# EAGLE board project_pcb (EAGLE 8.7.1)
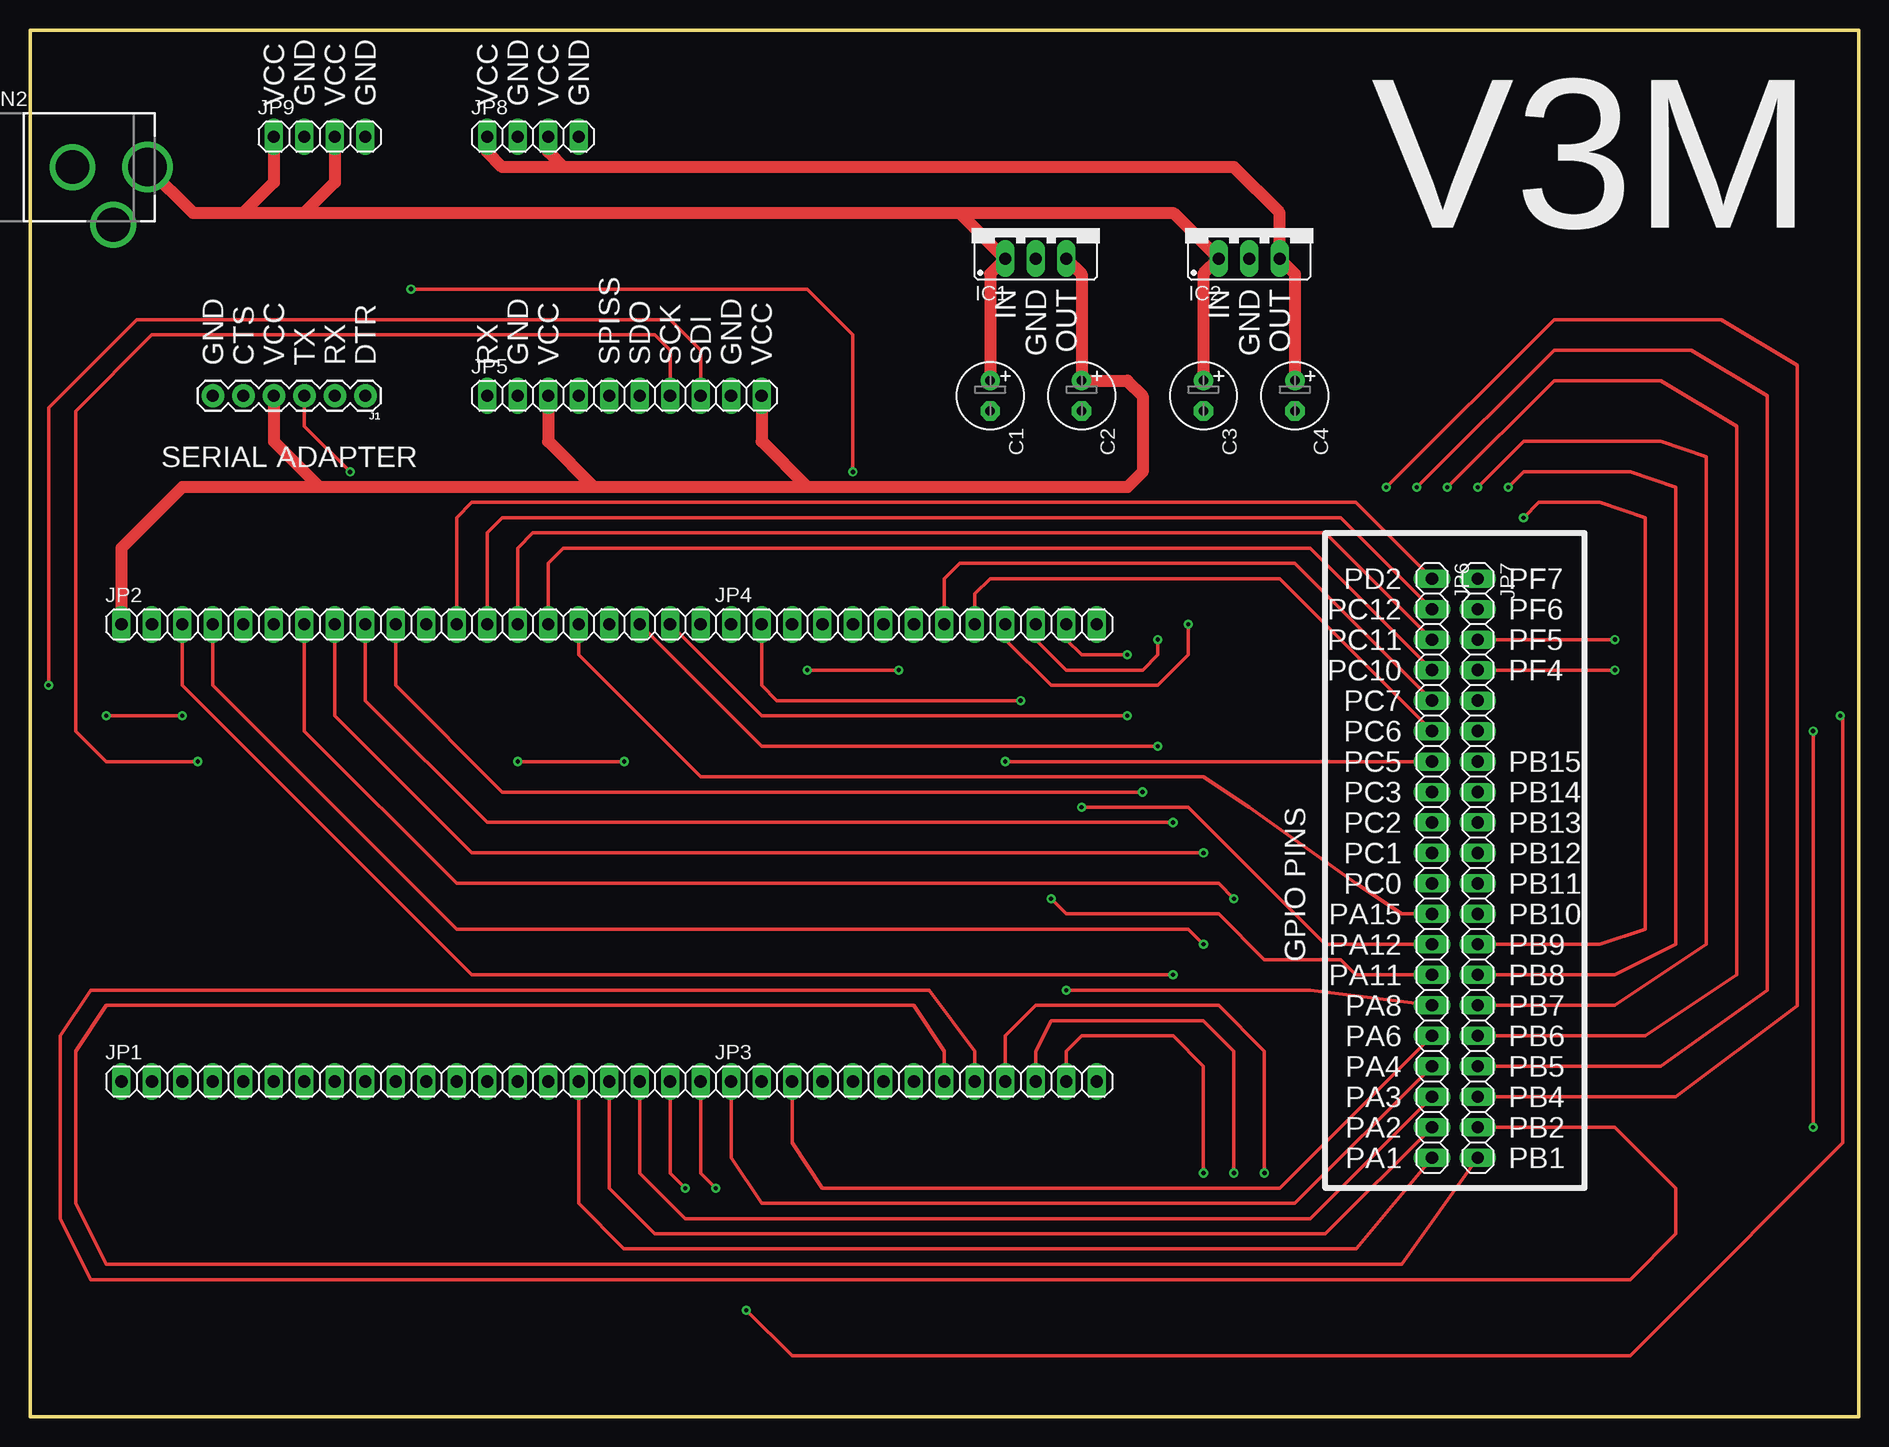
[diagram p0: board, top side]
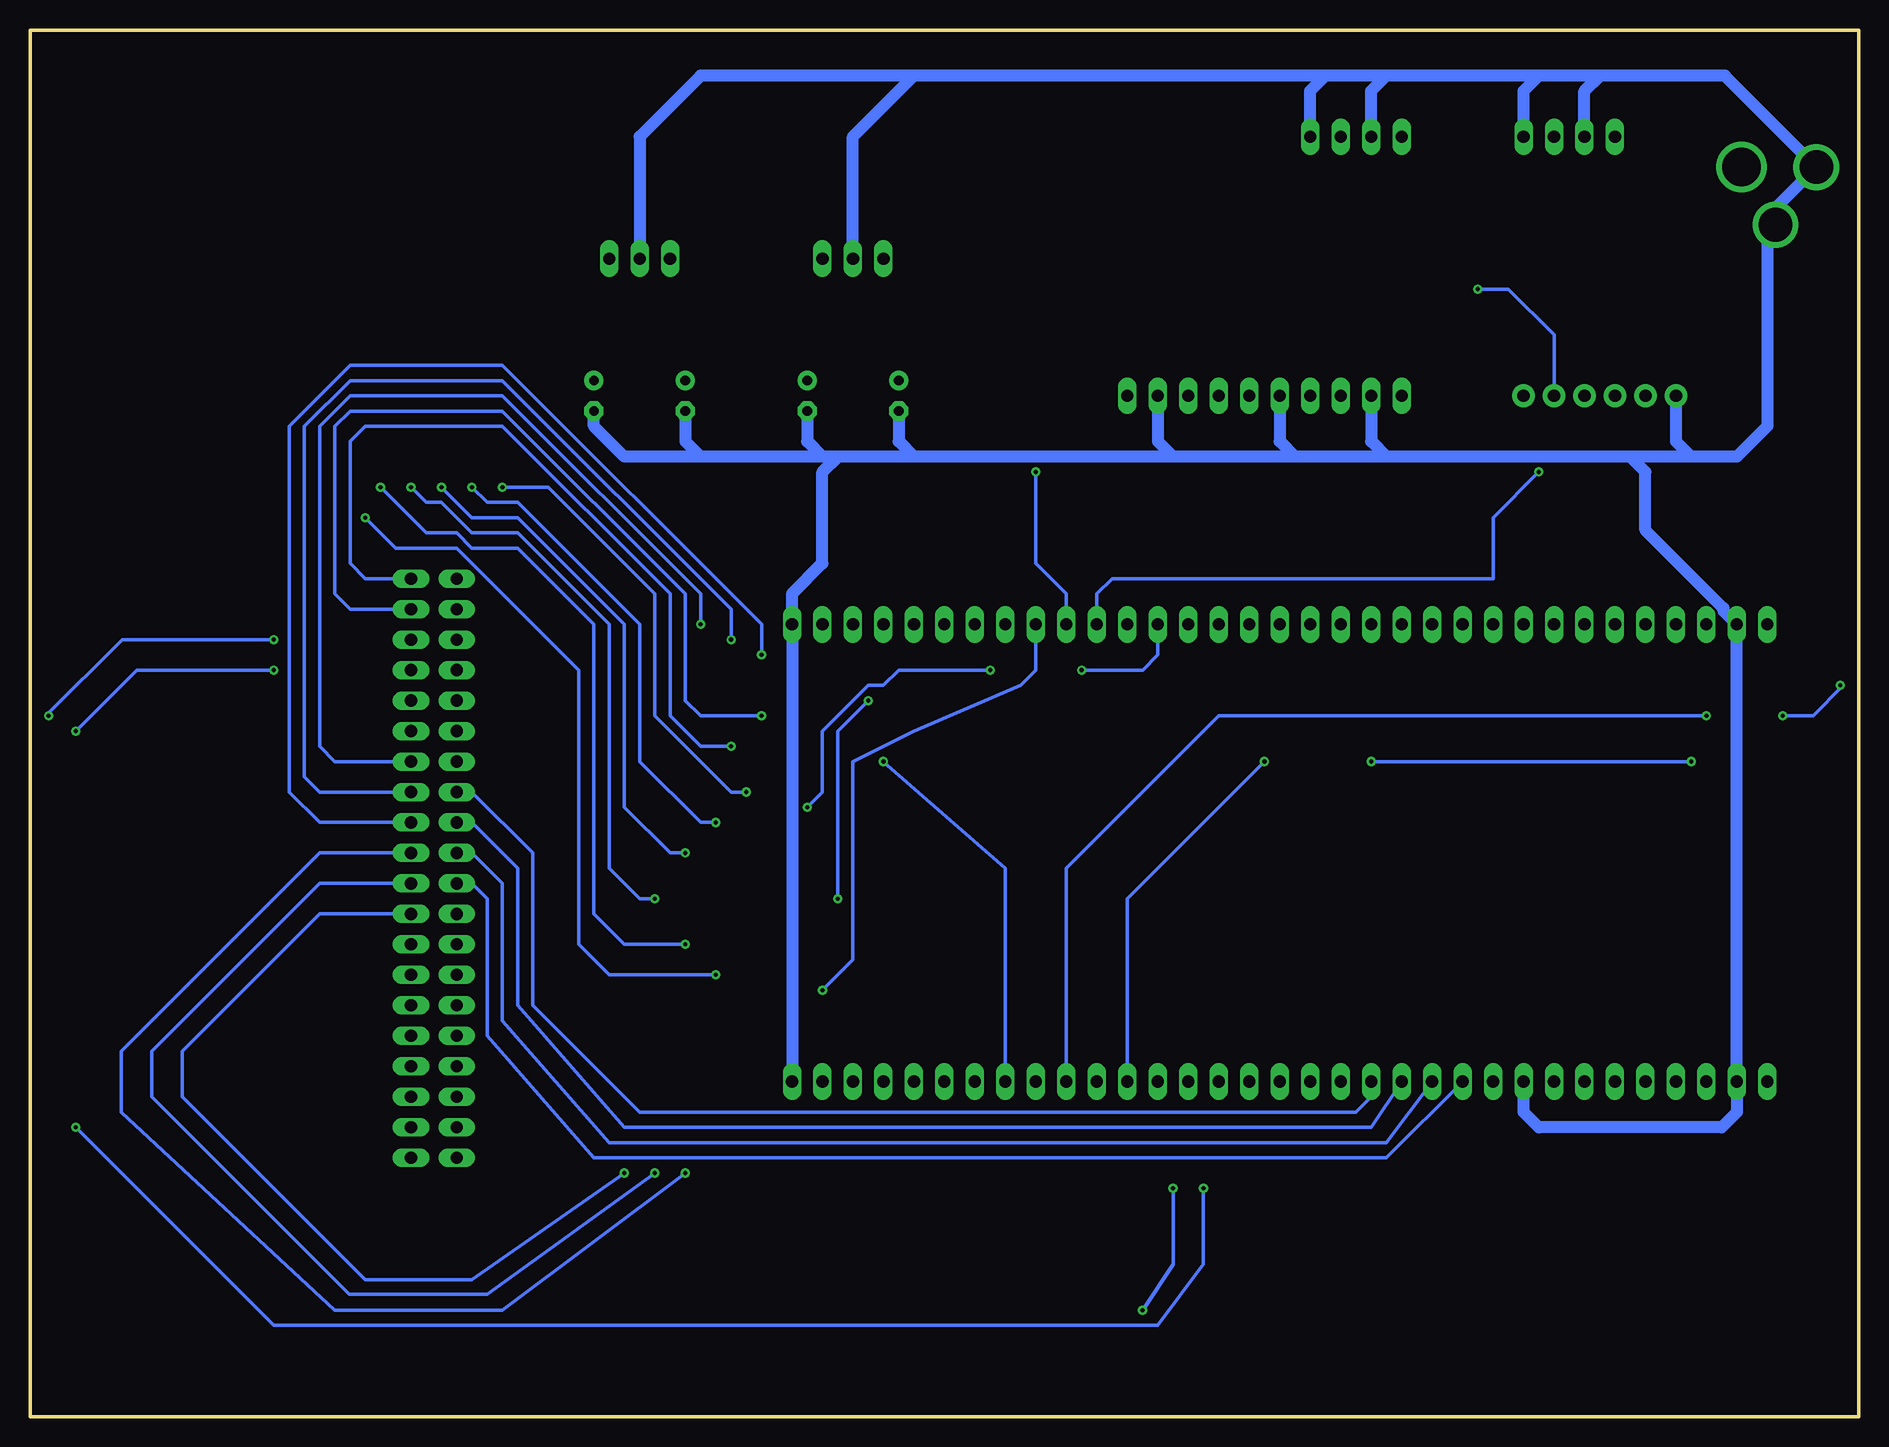
[diagram p1: board, bottom side, seen from below]

Size 152.4 x 115.57 mm. Coordinates in mm from the lower left corner, seen from the top.
Outline: 0,0 0,115.57 152.4,115.57 152.4,0 0,0
Copper layers (1*16): Top 0.035mm / dielectric 1.5mm / Bottom 0.035mm
Design rules "default": minimum track width 6mil, minimum drill 0.35mm, track to track 6mil, track to pad 6mil, pad to pad 6mil, via to via 6mil, smd to smd 6mil, copper to edge 40mil, drill to drill 6mil, minimum pad ring 10mil, minimum via ring 8mil, stop-mask expansion 4mil, vias tented up to drill 0mil, thermal gap 10mil
Net classes: 0 default: width 0.305 mm

## Footprints (pad centres in the part's own frame; a part is rotated, then mirrored left to right if it is on the bottom)
E2,5-6 = drill 0.813 pad 1.6: + -1.27,0 | drill 0.813 pad 1.6 octagon: - 1.27,0
DCJACK_2MM_PTH = drill 2.8: GND 0,7.35; GNDBREAK 4.8,10.75 | drill 3.2: PWR 0,13.6
78XXS = drill 1.016 long: GND 0,-2.54; IN -2.54,-2.54; OUT 2.54,-2.54
1X06 = drill 1.016 pad 1.88: 1 0,0; 2 2.54,0; 3 5.08,0; 4 7.62,0; 5 10.16,0; 6 12.7,0
1X20 = drill 1.016 long: 1 -24.13,0; 2 -21.59,0; 3 -19.05,0; 4 -16.51,0; 5 -13.97,0; 6 -11.43,0; 7 -8.89,0; 8 -6.35,0; 9 -3.81,0; 10 -1.27,0; 11 1.27,0; 12 3.81,0; 13 6.35,0; 14 8.89,0; 15 11.43,0; 16 13.97,0; 17 16.51,0; 18 19.05,0; 19 21.59,0; 20 24.13,0
1X13 = drill 1.016 long: 1 -15.24,0; 2 -12.7,0; 3 -10.16,0; 4 -7.62,0; 5 -5.08,0; 6 -2.54,0; 7 0,0; 8 2.54,0; 9 5.08,0; 10 7.62,0; 11 10.16,0; 12 12.7,0; 13 15.24,0
1X10 = drill 1.016 long: 1 -11.43,0; 2 -8.89,0; 3 -6.35,0; 4 -3.81,0; 5 -1.27,0; 6 1.27,0; 7 3.81,0; 8 6.35,0; 9 8.89,0; 10 11.43,0
1X04 = drill 1.016 long: 1 -3.81,0; 2 -1.27,0; 3 1.27,0; 4 3.81,0

## Placement (x,y rotation side)
C1  [E2,5-6]  80.01,85.09 270 top
C2  [E2,5-6]  87.63,85.09 270 top
C3  [E2,5-6]  97.79,85.09 270 top
C4  [E2,5-6]  105.41,85.09 270 top
CN2  [DCJACK_2MM_PTH]  -3.81,104.14 270 top
IC1  [78XXS]  83.82,99.06 0 top
IC2  [78XXS]  101.6,99.06 0 top
J1  [1X06]  27.94,85.09 180 top
JP1  [1X20]  31.75,27.94 0 top
JP2  [1X20]  31.75,66.04 0 top
JP3  [1X13]  73.66,27.94 0 top
JP4  [1X13]  73.66,66.04 0 top
JP5  [1X10]  49.53,85.09 0 top
JP6  [1X20]  116.84,45.72 270 top
JP7  [1X20]  120.65,45.72 270 top
JP8  [1X04]  41.91,106.68 0 top
JP9  [1X04]  24.13,106.68 0 top

## Library data of the parts
C1-C4 = rcl; SPICEPREFIX: C
CN2 = adafruit
IC1 IC2 = v-reg
J1 = SparkFun-Connectors
JP1-JP9 = pinhead

## Nets
N$1: J1.3 JP4.3
N$2: J1.2 JP4.4
N$3: C2.+ IC1.OUT J1.4 JP2.1 JP5.3 JP5.10
N$4: C1.- C2.- C3.- C4.- CN2.GND CN2.GNDBREAK IC1.GND IC2.GND J1.6 JP1.2 JP1.9 JP2.2 JP3.13 JP4.13 JP5.2 JP5.5 JP5.9 JP8.2 JP8.4 JP9.2 JP9.4
N$5: JP3.2 JP5.7
N$6: JP3.4 JP5.8
N$7: JP1.16 JP6.20
N$8: JP1.17 JP6.19
N$9: JP1.18 JP6.18
N$10: JP3.1 JP6.17
N$11: JP3.3 JP6.16
N$12: JP4.5 JP6.15
N$13: JP4.2 JP6.14
N$14: JP4.1 JP6.13
N$15: JP2.16 JP6.12
N$16: JP1.11 JP6.11
N$17: JP1.12 JP6.10
N$18: JP1.13 JP6.9
N$19: JP1.14 JP6.8
N$20: JP3.6 JP6.7
N$21: JP4.9 JP6.6
N$22: JP4.8 JP6.5
N$23: JP2.15 JP6.4
N$24: JP2.14 JP6.3
N$25: JP2.13 JP6.2
N$26: JP2.10 JP7.18
N$27: JP3.8 JP7.20
N$28: JP3.9 JP7.19
N$29: JP2.9 JP7.17
N$30: JP2.8 JP7.16
N$31: JP2.7 JP7.15
N$32: JP2.4 JP7.14
N$33: JP2.3 JP7.13
N$34: JP3.10 JP7.12
N$35: JP3.11 JP7.11
N$36: JP3.12 JP7.10
N$37: JP4.12 JP7.9
N$38: JP4.11 JP7.8
N$39: JP4.10 JP7.7
N$40: JP2.18 JP7.1
N$41: JP2.19 JP7.2
N$42: JP1.20 JP7.3
N$43: JP1.19 JP7.4
N$44: JP2.12 JP6.1
N$45: C4.+ IC2.OUT JP8.1 JP8.3
N$47: C1.+ C3.+ CN2.PWR IC1.IN IC2.IN JP9.1 JP9.3

## Tracks (layer width: path | path; a pad name or v marks a point on that pad's centre or on a via)
N$1  (via drill 0.35)
  Top 0.305: v26.67,78.74 22.86,82.55 J1.3
  Bottom 0.305: JP4.3 63.5,68.58 62.23,69.85 30.48,69.85 30.48,74.93 v26.67,78.74
N$2  (via drill 0.35)
  Top 0.305: v68.58,78.74 68.58,90.17 64.77,93.98 v31.75,93.98
  Bottom 0.305: JP4.4 66.04,68.58 68.58,71.12 v68.58,78.74 | v31.75,93.98 29.21,93.98 25.4,90.17 J1.2
N$3
  Top 1.016: IC1.OUT 87.63,95.25 C2.+ 91.44,86.36 92.71,85.09 92.71,78.74 91.44,77.47 64.77,77.47 | JP2.1 7.62,72.39 12.7,77.47 24.13,77.47 | 64.77,77.47 46.99,77.47 | 46.99,77.47 24.13,77.47 | J1.4 20.32,81.28 24.13,77.47 | JP5.3 43.18,81.28 46.99,77.47 | JP5.10 60.96,81.28 64.77,77.47
N$4
  Bottom 1.016: 21.59,111.76 11.16,111.76 CN2.GND 6.94,100.74 CN2.GNDBREAK 7.62,98.66 7.62,82.55 10.16,80.01 13.97,80.01 | 21.59,111.76 26.67,111.76 | 26.67,111.76 39.37,111.76 | 39.37,111.76 44.45,111.76 | 44.45,111.76 78.74,111.76 | 78.74,111.76 96.52,111.76 101.6,106.68 IC2.GND | IC1.GND 83.82,106.68 78.74,111.76 | 44.45,111.76 45.72,110.49 JP8.4 | JP8.2 40.64,110.49 39.37,111.76 | JP9.4 27.94,110.49 26.67,111.76 | JP9.2 22.86,110.49 21.59,111.76 | 13.97,80.01 19.05,80.01 | 19.05,80.01 39.37,80.01 | 39.37,80.01 46.99,80.01 | 46.99,80.01 57.15,80.01 | 57.15,80.01 78.74,80.01 | 78.74,80.01 85.09,80.01 | 85.09,80.01 86.36,80.01 | 86.36,80.01 96.52,80.01 | 96.52,80.01 102.87,80.01 105.41,82.55 C4.- | C3.- 97.79,81.28 96.52,80.01 | C2.- 87.63,81.28 86.36,80.01 | C1.- 80.01,81.28 78.74,80.01 | JP5.9 58.42,81.28 57.15,80.01 | JP5.5 48.26,81.28 46.99,80.01 | JP5.2 40.64,81.28 39.37,80.01 | J1.6 15.24,81.28 13.97,80.01 | 19.05,80.01 17.78,78.74 17.78,73.89 11.28,67.39 11.28,67.16 JP2.2 JP1.2 10.16,25.4 11.43,24.13 26.67,24.13 27.94,25.4 JP1.9 | 85.09,80.01 86.36,78.74 86.36,71.12 88.9,68.58 JP4.13 JP3.13
N$5  (via drill 0.35)
  Top 0.305: v49.53,54.61 v40.64,54.61 | v13.97,54.61 6.35,54.61 3.81,57.15 3.81,83.82 10.16,90.17 52.07,90.17 53.34,88.9 JP5.7
  Bottom 0.305: JP3.2 60.96,43.18 v49.53,54.61 | v40.64,54.61 v13.97,54.61
N$6  (via drill 0.35)
  Top 0.305: v12.7,58.42 v6.35,58.42 | v1.55,60.96 1.55,84.1 8.89,91.44 53.34,91.44 55.88,88.9 JP5.8
  Bottom 0.305: JP3.4 66.04,45.72 53.34,58.42 v12.7,58.42 | v6.35,58.42 3.81,58.42 1.32,60.91 1.32,60.96 v1.55,60.96
N$7
  Top 0.305: JP1.16 45.72,17.78 49.48,14.02 110.54,14.02 JP6.20
N$8
  Top 0.305: JP6.19 107.95,15.24 52.07,15.24 48.26,19.05 JP1.17
N$9
  Top 0.305: JP1.18 50.8,20.32 54.61,16.51 106.68,16.51 JP6.18
N$10
  Top 0.305: JP3.1 58.42,21.59 60.96,17.78 105.41,17.78 JP6.17
N$11
  Top 0.305: JP3.3 63.5,22.86 66.04,19.05 104.14,19.05 JP6.16
N$12  (via drill 0.35)
  Top 0.305: JP6.15 106.68,35.56 v86.36,35.56
  Bottom 0.305: v86.36,35.56 83.82,38.1 83.82,54.61 78.74,57.15 69.85,60.96 68.58,62.23 JP4.5
N$13  (via drill 0.35)
  Top 0.305: JP6.14 110.49,36.83 109.22,38.1 102.87,38.1 99.06,41.91 86.36,41.91 v85.09,43.18 | JP4.2 60.96,60.96 62.23,59.69 v82.55,59.69
  Bottom 0.305: v85.09,43.18 85.09,57.15 v82.55,59.69
N$14  (via drill 0.35)
  Top 0.305: JP6.13 107.95,39.37 96.52,50.8 v87.63,50.8 | v72.39,62.23 v64.77,62.23
  Bottom 0.305: v87.63,50.8 86.36,52.07 86.36,57.15 82.55,60.96 81.28,60.96 80.01,62.23 v72.39,62.23 | v64.77,62.23 59.69,62.23 58.42,63.5 JP4.1
N$15
  Top 0.305: JP2.16 45.72,63.5 55.88,53.34 97.79,53.34 101.6,50.8 110.49,44.45 114.3,41.91 JP6.12
N$16
  Bottom 0.305: JP6.11 115.57,44.45 114.3,43.18 114.3,31.75 105.41,21.59 39.37,21.59 JP1.11
N$17
  Bottom 0.305: JP6.10 115.57,46.99 113.03,44.45 113.03,33.02 104.14,22.86 39.37,22.86 JP1.12
N$18
  Bottom 0.305: JP1.13 40.64,24.13 102.87,24.13 111.76,34.29 111.76,45.72 115.57,49.53 JP6.9
N$19
  Bottom 0.305: JP6.8 115.57,52.07 110.49,46.99 110.49,34.29 101.6,25.4 41.91,25.4 40.64,26.67 JP1.14
N$20  (via drill 0.35)
  Top 0.305: v81.28,54.61 JP6.7
  Bottom 0.305: JP3.6 71.12,45.72 v81.28,54.61
N$21
  Top 0.305: JP6.6 104.14,69.85 80.01,69.85 78.74,68.58 JP4.9
N$22
  Top 0.305: JP6.5 105.41,71.12 77.47,71.12 76.2,69.85 JP4.8
N$23
  Top 0.305: JP6.4 106.68,72.39 44.45,72.39 43.18,71.12 JP2.15
N$24
  Top 0.305: JP6.3 107.95,73.66 41.91,73.66 40.64,72.39 JP2.14
N$25
  Top 0.305: 116.84,67.58 JP6.2 109.22,74.93 39.37,74.93 38.1,73.66 JP2.13
N$26  (via drill 0.35)
  Top 0.305: JP7.18 137.16,26.67 147.27,34.24 147.27,87.63 140.92,91.44 127,91.44 v113.03,77.47 | JP2.10 30.48,60.96 39.37,52.07 v92.71,52.07
  Bottom 0.305: v113.03,77.47 109.22,77.47 100.33,68.58 100.33,58.42 93.98,52.07 v92.71,52.07
N$27
  Top 0.305: JP7.20 114.3,12.7 6.35,12.7 3.81,17.78 3.81,30.48 6.35,34.29 73.66,34.29 76.2,30.48 JP3.8
N$28
  Top 0.305: JP7.19 132.08,24.13 137.16,19.05 137.16,15.24 133.35,11.43 5.08,11.43 2.54,16.51 2.54,31.75 5.08,35.56 74.93,35.56 78.74,30.48 JP3.9
N$29  (via drill 0.35)
  Top 0.305: JP7.17 135.89,29.21 144.78,35.56 144.78,85.09 138.43,88.9 127,88.9 v115.57,77.47 | v95.25,49.53 38.1,49.53 27.94,59.69 JP2.9
  Bottom 0.305: v115.57,77.47 114.3,76.2 111.76,76.2 101.6,66.04 101.6,54.61 96.52,49.53 v95.25,49.53
N$30  (via drill 0.35)
  Top 0.305: JP7.16 134.62,31.75 142.24,36.83 142.24,82.55 135.89,86.36 127,86.36 v118.11,77.47 | JP2.8 25.4,58.42 36.83,46.99 v97.79,46.99
  Bottom 0.305: v118.11,77.47 115.57,74.93 111.76,74.93 102.87,66.04 102.87,50.8 99.06,46.99 v97.79,46.99
N$31  (via drill 0.35)
  Top 0.305: JP7.15 132.08,34.29 139.7,39.37 139.7,80.01 135.89,81.28 124.46,81.28 v120.65,77.47 | v100.33,43.18 99.06,44.45 35.56,44.45 22.86,57.15 JP2.7
  Bottom 0.305: v120.65,77.47 119.38,76.2 118.11,76.2 115.57,73.66 111.76,73.66 104.14,66.04 104.14,45.72 101.6,43.18 v100.33,43.18
N$32  (via drill 0.35)
  Top 0.305: JP7.14 132.08,36.83 137.16,39.37 137.16,77.47 133.35,78.74 124.46,78.74 v123.19,77.47 | v97.79,39.37 96.52,40.64 35.56,40.64 15.24,60.96 JP2.4
  Bottom 0.305: v123.19,77.47 119.38,73.66 116.84,73.66 115.57,72.39 111.76,72.39 105.41,66.04 105.41,41.91 102.87,39.37 v97.79,39.37
N$33  (via drill 0.35)
  Top 0.305: JP7.13 130.81,39.37 134.62,40.64 134.62,74.93 130.81,76.2 125.73,76.2 v124.46,74.93 | v95.25,36.83 36.83,36.83 12.7,60.96 JP2.3
  Bottom 0.305: v124.46,74.93 121.92,72.39 116.84,72.39 106.68,62.23 106.68,39.37 104.14,36.83 v95.25,36.83
N$34  (via drill 0.35)
  Top 0.305: v102.87,20.32 102.87,30.48 99.06,34.29 83.82,34.29 81.28,31.75 JP3.10
  Bottom 0.305: JP7.12 128.27,41.91 139.7,30.48 139.7,26.67 124.46,11.43 115.57,11.43 v102.87,20.32
N$35  (via drill 0.35)
  Top 0.305: v100.33,20.32 100.33,30.48 97.79,33.02 85.09,33.02 83.82,30.48 JP3.11
  Bottom 0.305: JP7.11 128.27,44.45 142.24,30.48 142.24,26.67 125.78,10.21 114.3,10.21 v100.33,20.32
N$36  (via drill 0.35)
  Top 0.305: v97.79,20.32 97.79,29.21 95.25,31.75 87.63,31.75 86.36,30.48 JP3.12
  Bottom 0.305: JP7.10 128.27,46.99 144.78,30.48 144.78,25.4 127,8.89 113.03,8.89 v97.79,20.32
N$37  (via drill 0.35)
  Top 0.305: v91.44,63.5 87.63,63.5 86.36,64.77 JP4.12
  Bottom 0.305: JP7.9 128.27,49.53 130.81,52.07 130.81,82.55 125.73,87.63 113.03,87.63 91.44,66.04 v91.44,63.5
N$38  (via drill 0.35)
  Top 0.305: JP4.11 83.82,64.77 86.36,62.23 92.71,62.23 93.98,63.5 v93.98,64.77
  Bottom 0.305: JP7.8 128.27,52.07 129.54,53.34 129.54,82.55 125.73,86.36 113.03,86.36 93.98,67.31 v93.98,64.77
N$39  (via drill 0.35)
  Top 0.305: JP4.10 81.28,64.77 85.09,60.96 93.98,60.96 96.52,63.5 v96.52,66.04
  Bottom 0.305: JP7.7 127,54.61 128.27,55.88 128.27,82.55 125.73,85.09 113.03,85.09 96.52,68.58 v96.52,66.04
N$40  (via drill 0.35)
  Top 0.305: v93.98,55.88 60.96,55.88 JP2.18
  Bottom 0.305: JP7.1 124.46,69.85 125.73,71.12 125.73,81.28 124.46,82.55 113.03,82.55 99.06,68.58 99.06,58.42 96.52,55.88 v93.98,55.88
N$41  (via drill 0.35)
  Top 0.305: v91.44,58.42 60.96,58.42 JP2.19
  Bottom 0.305: JP7.2 125.73,67.31 127,68.58 127,82.55 125.73,83.82 113.03,83.82 97.79,68.58 97.79,59.69 96.52,58.42 v91.44,58.42
N$42  (via drill 0.35)
  Top 0.305: JP7.3 v132.08,64.77 | v150.85,58.42 151.08,58.19 151.08,22.86 135.89,7.62 133.35,5.08 63.5,5.08 v59.69,8.89 | v57.15,19.05 55.88,20.32 JP1.20
  Bottom 0.305: v132.08,64.77 144.73,64.77 151.08,58.42 v150.85,58.42 | v59.69,8.89 57.15,12.7 v57.15,19.05
N$43  (via drill 0.35)
  Top 0.305: JP7.4 v132.08,62.23 | v148.59,57.15 v148.59,24.13 | v54.61,19.05 53.34,20.32 JP1.19
  Bottom 0.305: v132.08,62.23 143.51,62.23 v148.59,57.15 | v148.59,24.13 132.08,7.62 58.42,7.62 54.61,12.7 v54.61,19.05
N$44
  Top 0.305: JP6.1 110.49,76.2 36.83,76.2 35.56,74.93 JP2.12
N$45
  Top 1.016: C4.+ 105.41,95.25 IC2.OUT 104.14,100.33 100.33,104.14 44.45,104.14 | 44.45,104.14 39.37,104.14 38.1,105.41 JP8.1 | JP8.3 43.18,105.41 44.45,104.14
N$47
  Top 1.016: CN2.PWR 13.6,100.33 17.78,100.33 | 17.78,100.33 22.86,100.33 | 22.86,100.33 77.47,100.33 | 77.47,100.33 95.25,100.33 IC2.IN 97.79,95.25 C3.+ | 77.47,100.33 IC1.IN 80.01,95.25 C1.+ | JP9.1 20.32,102.87 17.78,100.33 | JP9.3 25.4,102.87 22.86,100.33

## Text on the board
tPlace: VCC | GND | VCC | GND | VCC | GND | VCC | GND | IN | GND | OUT | IN | GND | OUT | GND | CTS | VCC | TX | RX | DTR | RX | GND | VCC | SPISS | SDO | SCK | SDI | GND | VCC | SERIAL ADAPTER | PD2 | PF7 | PC12 | PF6 | PC11 | PF5 | PC10 | PF4 | PC7 | PC6 | PC5 | PB15 | PC3 | PB14 | GPIO PINS | PC2 | PB13 | PC1 | PB12 | PC0 | PB11 | PA15 | PB10 | PA12 | PB9 | PA11 | PB8 | PA8 | PB7 | PA6 | PB6 | PA4 | PB5 | PA3 | PB4 | PA2 | PB2 | PA1 | PB1
tSilk: V3M